# Altium PCB ARM2-2.5.PcbDoc (part 2 of 2)
Units mil, origin at the board's own origin, x right, y up, seen from the top; angles counter-clockwise.
Board outline 3929.03 x 3937.01 mil, 4 copper layers (Top Layer, VCC, GND, Bottom Layer); 147 components, 96 nets, 586 pads, 225 vias.
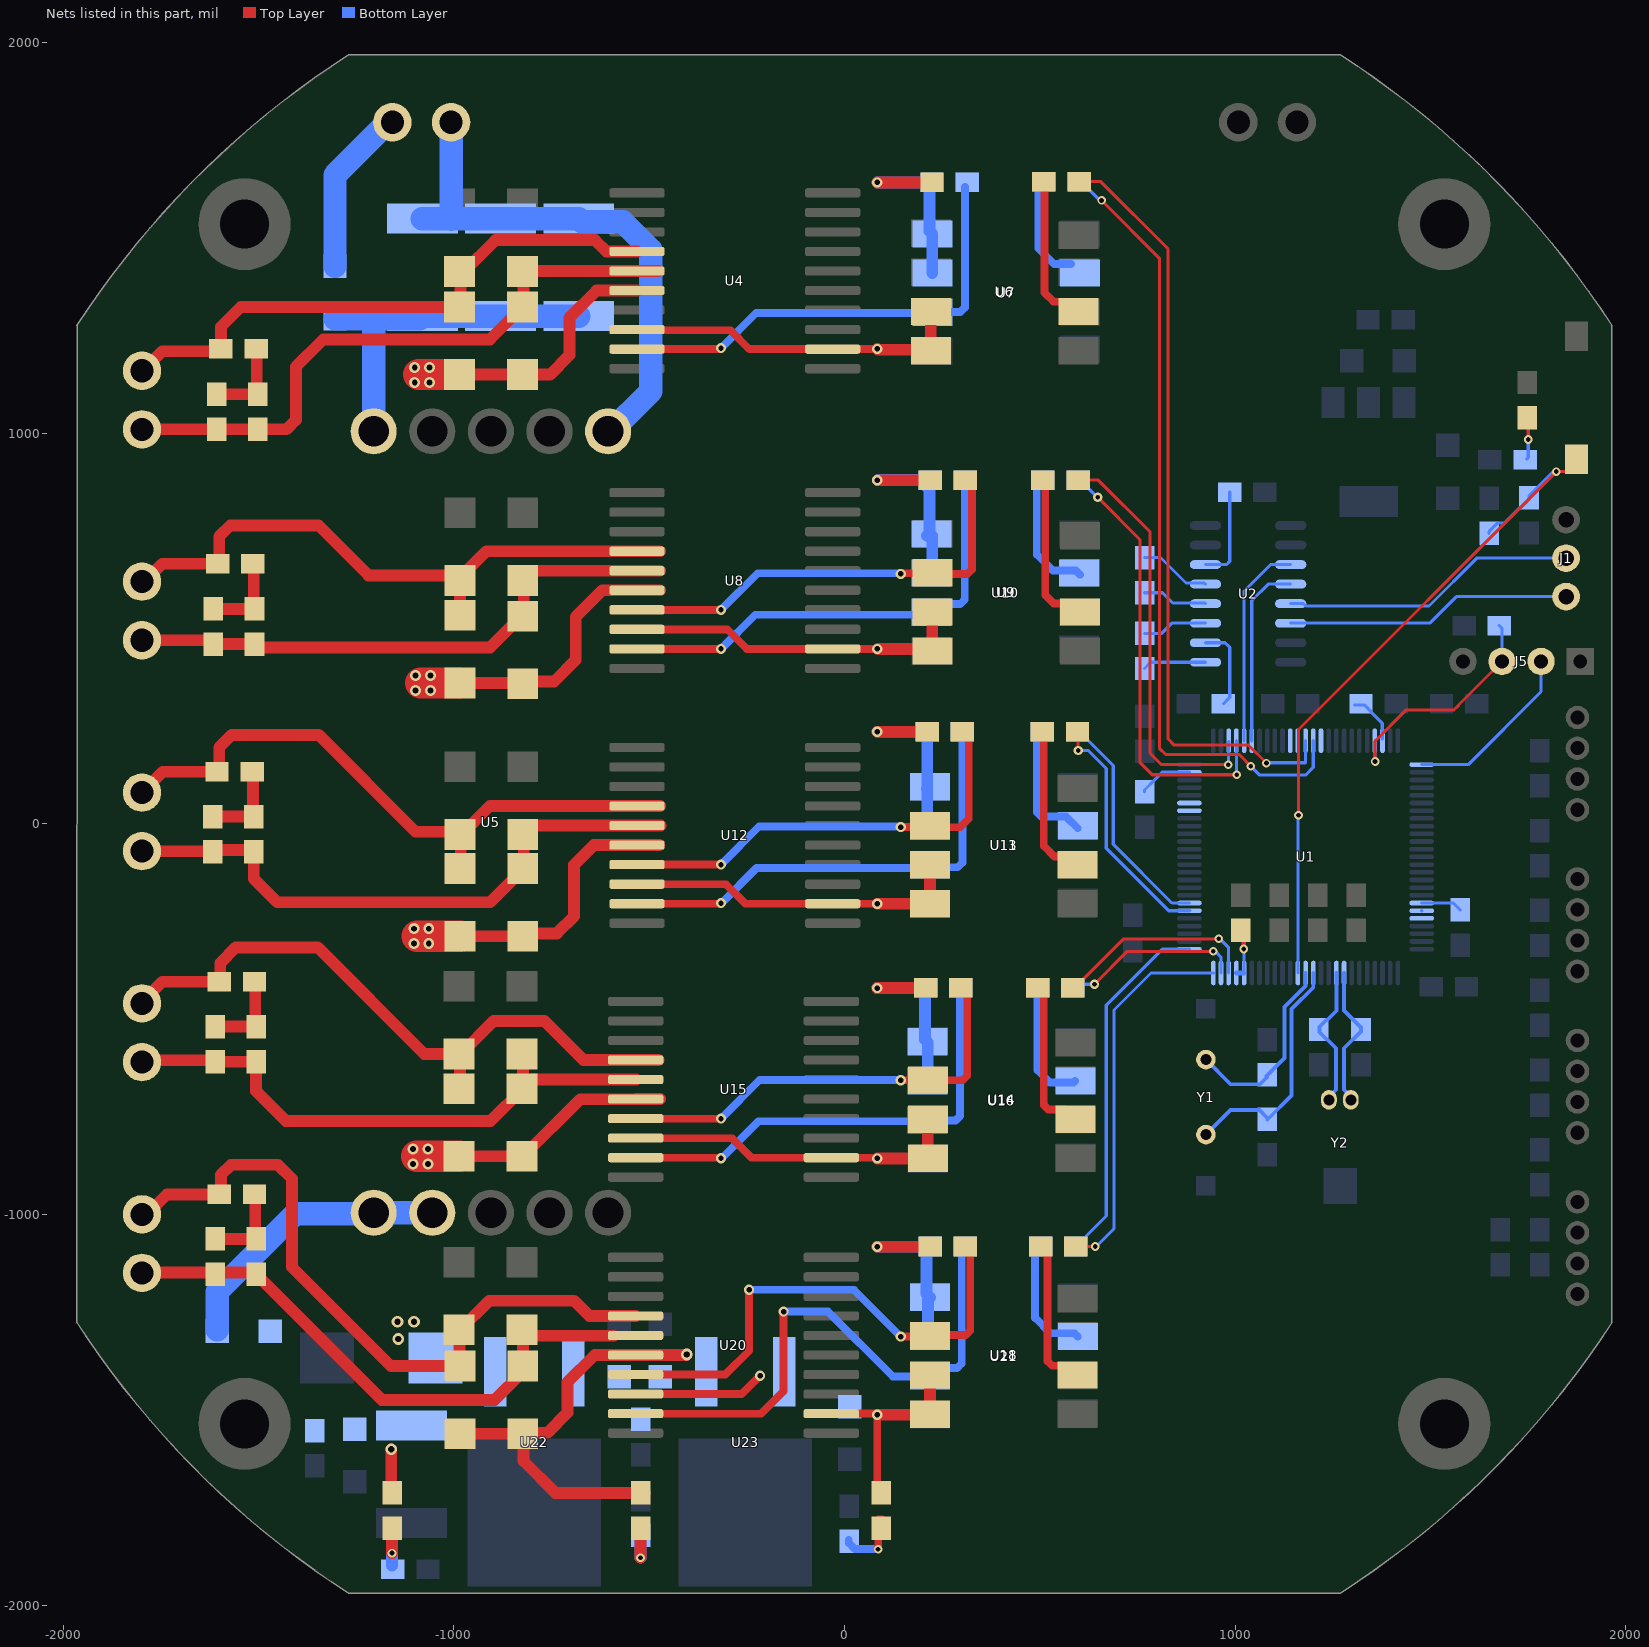
[diagram p4: the nets of this part, all layers, seen from the top]

## Via types
v1: diameter 22, hole 12, Top Layer to Bottom Layer, 120 vias
v2: diameter 26, hole 14, Top Layer to Bottom Layer, 77 vias
v3: diameter 28, hole 15, Top Layer to Bottom Layer, 16 vias
v4: diameter 24, hole 12, Top Layer to Bottom Layer, 7 vias
v5: diameter 30, hole 16, Top Layer to Bottom Layer, 5 vias

## Nets (pads, with @x,y where several pads share a name; then routed paths per layer and width w, separated by ;. In a path a pad name is that pad's centre, name@x,y a point inside that pad or via, vN(x,y) a via of type N, cw(c..) or ccw(c..) an arc to the next point about the centre after c; other vN are vias at no path point) (continued)
IN2: R15.2 U4.9 U7.6 | length 1190.8
  Top Layer w20: U4.9@-531.13,1215.38 -318.62,1215.38 v2(-316,1218)
  Bottom Layer w20: v2(-316,1218) -225.78,1308.22 U7.6@224.88,1308.22 ; U7.6@224.88,1310.22 296.5,1310.22 308.22,1321.94 R15.2@308.22,1630.06
IN3: R17.2 U8.7 U9.6 | length 1120
  Top Layer w20: U8.7@-531.13,548.21 -531.03,548.11 -420.11,548.11 -420,548 v2(-316,548) ; v2(144,640) 145.62,640 147.62,642 222.58,642 224.86,639.72 314.28,639.72 326,651.44 R17.2@326,874
  Bottom Layer w20: v2(-316,548) -222,642 v2@138.68,642
IN4: R20.2 U8.9 U10.6 | length 1178.2
  Top Layer w20: U8.9@-531.13,448.21 -531.03,448.11 -316.11,448.11 v2(-316,448)
  Bottom Layer w20: v2(-316,448) -228.28,535.72 U10.6@224.88,535.72 ; U10.6@224.88,537.72 249.92,562.76 295.98,562.76 307.7,574.48 R20.2@307.7,862.19
IN5: R22.2 U11.6 U12.7 | length 1122.1
  Top Layer w20: U12.7@-531.13,-104 v2(-316,-104) ; v2(144,-8) 214.58,-8 216.58,-6 218.86,-8.28 296,-8.28 318,13.72 318,221.32 303,236.32 R22.2@301.38,236.32
  Bottom Layer w20: v2(-316,-104) -218,-6 v2@135.04,-6
IN6: R24.2 U12.9 U13.6 | length 1211.2
  Top Layer w20: U12.9@-531.13,-204 v2@-316,-204
  Bottom Layer w20: v2@-316.77,-201.54 v2(-316,-202.31) -314.53,-202.31 -225,-112.78 U13.6@218.88,-112.78 ; U13.6@218.88,-110.78 289.98,-110.78 301.7,-99.07 R24.2@301.7,236.32
IN7: R27.2 U14.6 U15.7 | length 1118.8
  Top Layer w20: U15.7@-533.13,-754.21 v2@-316,-754.21 ; v2@142.85,-654.85 v2(144,-656) 213.14,-656 213.19,-655.94 302.28,-655.94 314,-644.23 314,-440.21 R27.2@299,-425.21
  Bottom Layer w20: v2(-316,-754) -216.85,-654.85 v2@142.85,-654.85
IN8: R30.2 U15.9 U16.6 | length 1193.6
  Top Layer w20: U15.9@-533.13,-854.21 v2@-316,-854.21
  Bottom Layer w20: v2@-314.38,-855.47 -219.85,-760.95 U16.6@213.22,-760.95 ; U16.6@213.22,-758.95 284.32,-758.95 296.04,-747.23 R30.2@296.04,-425.21
  other v2: -316,-855.47
IN9: R34.2 U18.6 U20.7 | length 1318.8
  Top Layer w20: U20.7@-534.67,-1409.06 -305.06,-1409.06 -244,-1348 v2(-244,-1192) ; v2(144,-1312) 216.64,-1312 220.43,-1308.22 310.28,-1308.22 322,-1296.5 R34.2@322,-1096.35 ; R34.2@309.68,-1081.35 313,-1081.35 R34.2@328,-1096.35
  Bottom Layer w20: v2(-244,-1192) 24,-1192 v2(144,-1312)
IN10: R36.2 U20.9 U21.6 | length 1430.1
  Top Layer w20: U20.9@-534.67,-1509.06 -534.2,-1509.53 -213.53,-1509.53 -156,-1452 v2(-156,-1248)
  Bottom Layer w20: v2(-156,-1248) -42,-1248 123.72,-1413.72 U21.6@218.86,-1413.72 ; U21.6@218.86,-1411.72 238.44,-1392.14 288.28,-1392.14 300,-1380.42 R36.2@300,-1094.65
INPUT1: R13.1 U1.63 | length 1987.5
  Top Layer w8: R13.1@600.36,1644.06 655.94,1644.06 828,1472 828,218 844,202 1034,202 v1(1080,156)
  Bottom Layer w8: v1(1080,156) 1080.69,156.69 1180.21,156.69 U1.63@1180.21,213.11
INPUT2: R16.1 U1.64 | length 2033.6
  Top Layer w8: v1(658,1596) 806,1448 806,194.06 822.06,178 1010,178 v1(1040,148)
  Bottom Layer w8: R16.1@599.81,1628.06 621.36,1628.06 650.74,1598.68 655.32,1598.68 v1(658,1596) ; v1(1040,148) 1063,125 1179.87,125 1199.89,145.02 U1.64@1199.89,213.11
INPUT3: R18.1 U1.53 | length 1076.9
  Top Layer w8: R18.1@598,880.19 649.81,880.19 782,748 782,181.29 811.29,152 v1(982,152)
  Bottom Layer w8: v1(982,152) 982.68,152.68 982.68,209.61 U1.53@983.68,210.61
INPUT4: R21.1 U1.54 | length 1128.3
  Top Layer w8: v4(648,836) 756,728 756,158 788,126 v1(1004,126)
  Bottom Layer w8: R21.1@602,862.19 621,862.19 647.19,836 v4(648,836) ; U1.54@1003.04,213.03 1003.52,212.55 1003.52,126.48 v1(1004,126)
INPUT5: R23.1 U1.31 | length 623
  Top Layer w8: v4(598,188) R23.1@598,235.68
  Bottom Layer w8: v4(598,188) 624,188 670,142 670,-62 829.93,-221.93 U1.31@882.97,-221.93 U1.31@883.7,-221.2
INPUT6: R26.1 U1.32 | length 589.4
  Bottom Layer w8: R26.1@605,218.32 618.68,232 618.68,219 688,149.68 688,-52.24 838,-202.24 U1.32@882.97,-202.24
INPUT7: R28.1 U1.23 | length 525
  Top Layer w8: R28.1@584.34,-419.21 589.34,-419.21 714.55,-294 v1(958,-294)
  Bottom Layer w8: v1(958,-294) 960.57,-294 983.35,-316.78 U1.23@983.35,-381.44
INPUT8: R31.1 U1.24 | length 453.5
  Top Layer w8: v4(640,-410) 724,-326 v1(944,-326)
  Bottom Layer w8: R31.1@604,-426.21 604,-416.33 610.34,-410 v4(640,-410) ; v1(944,-326) 946.68,-328.68 951.19,-328.68 963.67,-341.15 U1.24@963.67,-381.37 U1.24@963.67,-381.37
INPUT9: R35.1 U1.25 | length 970
  Top Layer w8: R35.1@592,-1081.35 v1(642,-1081.35)
  Bottom Layer w8: v1(642,-1081.35) 644.65,-1081.35 690,-1036 690,-476 784.63,-381.37 U1.25@943.99,-381.37
INPUT10: R37.1 U1.26 | length 927.9
  Bottom Layer w8: R37.1@594,-1079.35 R37.1@592,-1081.35 597,-1081.35 618,-1060.35 618,-1055.35 670,-1003.35 670,-464 813.65,-320.35 U1.26@882.97,-320.35
INPUT_CeTui1: U1.95 | length 1
  Bottom Layer w8: U1.95@1476.72,-221.2 U1.95@1477.45,-221.93
INPUT_CeTui2: U1.96
INPUT_CeTui3: U1.44
INPUT_CeTui4: U1.45
INPUT_DuoJi1: U1.61
INPUT_DuoJi2: U1.62
INPUT_ZhuTui: U1.65
NetC8_2: C8.2 U1.49 | length 138.8
  Bottom Layer w8: C8.2@768,82 768,87 795.67,114.67 813.41,132.41 U1.49@882.97,132.41
NetC9_2: C9.2 U1.73 | length 130.5
  Bottom Layer w8: C9.2@1306,305 1330,305 1348,287 1348,286 1376.33,257.67 U1.73@1376.33,217.67
NetC11_1: C11.1 U2.3 | length 166.7
  Bottom Layer w8: C11.1@768,488 812,488 838,514 U2.3@923.96,514
NetC11_2: C11.2 U2.1 | length 162.6
  Bottom Layer w8: C11.2@768,398 784,414 U2.1@923.96,414
NetC14_1: C14.1 U2.2 | length 217.6
  Bottom Layer w8: U2.2@923.96,464 974,464 986,452 986,324 C14.1@970,308
NetC19_1: C19.1 U2.5 | length 184.1
  Bottom Layer w8: C19.1@768,682 809,682 874.21,616.79 921.17,616.79 U2.5@923.96,614
NetC19_2: C19.2 U2.4 | length 167.6
  Bottom Layer w8: C19.2@768,592 814,592 840.42,565.58 922.38,565.58 U2.4@923.96,564
NetC20_2: C20.2 U2.6 | length 242.4
  Bottom Layer w8: U2.6@923.96,664 978,664 986.2,672.2 C20.2@986.2,849
NetC23_1: C23.1 C24.1 C25.1 F1.2 U5.1 | length 905.6
  Bottom Layer w60: F1.2@-1304,1293 -1086.77,1293 C25.1@-1080.15,1299.62 C24.1@-880.15,1299.62 C23.1@-680.15,1299.62 ; U5.1@-1205,1005 -1205,1284
NetC23_2: C23.2 C24.2 C25.2 J9.1 U5.5 | length 1377.6
  Bottom Layer w60: C25.2@-1080.15,1549.62 C25.2@-1007,1549.62 ; C25.2@-1007,1548 C25.2@-1007,1549.62 ; J9.1@-1007,1791.55 C25.2@-1007,1549.62 ; U5.5@-605,998.2 -496,1107.2 -496,1470 -567.24,1541.24 -671.76,1541.24 C23.2@-680.15,1549.62 C24.2@-880.15,1549.62 C25.2@-1007,1549.62
NetDS1_2: DS1.2 DS2.1 R14.1 | length 222.7
  Top Layer w30: DS2.1@-1607,1100 DS1.2@-1502,1100 -1504,1102 -1504,1214 R14.1@-1506,1216
NetDS3_2: DS3.2 DS4.1 R19.1 | length 222.2
  Top Layer w30: DS4.1@-1615,550.5 DS3.2@-1510,550.5 -1512,552.5 -1512,664 R19.1@-1514,666
NetDS5_2: DS5.2 DS6.1 R25.1 | length 221.7
  Top Layer w30: DS6.1@-1617,19 DS5.2@-1512,19 -1514,21 -1514,132 R25.1@-1516,134
NetDS7_2: DS7.2 DS8.1 R32.1 | length 221.2
  Top Layer w30: DS8.1@-1611,-518.5 DS7.2@-1506,-518.5 -1508,-516.5 -1508,-406 R32.1@-1510,-404
NetDS9_2: DS9.2 DS10.1 R38.1 | length 220.7
  Top Layer w30: DS10.1@-1611,-1062 DS9.2@-1506,-1062 -1508,-1060 -1508,-950 R38.1@-1510,-948
NetF1_1: F1.1 J9.2 | length 426.7
  Bottom Layer w60: F1.1@-1304,1428 -1304,1661 J9.2@-1167,1798
NetF2_1: F2.1 U5.9 U5.10 | length 730.7
  Bottom Layer w60: F2.1@-1605,-1294 -1605,-1197 -1405.4,-997.4 -1207.4,-997.4 U5.10@-1205,-995 U5.9@-1055,-995
NetLED1_1: LED1.1 R4.1 | length 108.5
  Top Layer w8: LED1.1@1748,1040 1750,1038 v1(1750,984)
  Bottom Layer w8: R4.1@1746,934 1750,938 v1(1750,984)
NetLED2_2: LED2.2 R29.1 | length 96
  Top Layer w30: v1(-1158,-1866) LED2.2@-1158,-1802
  Bottom Layer w30: R29.1@-1158,-1898 v1(-1158,-1866)
NetLED3_2: LED3.2 R41.1 | length 134
  Top Layer w30: v1(-522,-1878) LED3.2@-522,-1802
  Bottom Layer w30: v1(-522,-1878) R41.1@-522,-1820
NetLED4_2: LED4.2 R42.1 | length 174.8
  Top Layer w20: v1(86,-1856) 86.38,-1855.62 86.38,-1782.38 86,-1782 88,-1780 LED4.2@96,-1780
  Bottom Layer w20: R42.1@11,-1832 11,-1840 27,-1856 v1(86,-1856)
NetR2_1: R2.1 U1.94 | length 105.9
  Bottom Layer w8: U1.94@1477.45,-202.24 1558.24,-202.24 R2.1@1576,-220
NetR13_2: R13.2 U6.2 | length 376.9
  Top Layer w20: R13.2@512,1630.06 512,1360 535.24,1336.76 573.78,1336.76 U6.2@598.82,1311.72
NetR16_2: R16.2 U7.2 | length 265
  Bottom Layer w20: R16.2@496,1638 496,1474 536.99,1433.01 U7.2@580.05,1433.01
NetR18_2: R18.2 U9.2 | length 403.4
  Top Layer w20: R18.2@508,880.19 514,874.19 514,586 535.73,564.27 581.27,564.27 U9.2@602.82,542.72
NetR21_2: R21.2 U10.2 | length 329.9
  Bottom Layer w20: R21.2@508,880.19 507,880.19 492,865.19 492,690 533.38,648.62 591.94,648.62 U10.2@602.84,637.72
NetR23_2: R23.2 U11.2 | length 382.8
  Top Layer w20: R23.2@510,218.32 510,-56 537.24,-83.24 571.78,-83.24 U11.2@596.82,-108.28
NetR26_2: R26.2 U13.2 | length 309.7
  Bottom Layer w20: R26.2@492,218.32 492,30.64 503.72,18.92 567.14,18.92 U13.2@596.84,-10.78
NetR28_2: R28.2 U14.2 | length 390.4
  Top Layer w20: R28.2@510,-425.21 510,-719.19 521.72,-730.91 566.11,-730.91 U14.2@591.15,-755.94
NetR31_2: R31.2 U16.2 | length 321.1
  Bottom Layer w20: R31.2@494.34,-419.21 494.34,-630.33 525.44,-661.44 586.56,-661.44 U16.2@590,-658
NetR35_2: R35.2 U18.2 | length 395.4
  Top Layer w20: R35.2@502,-1081.35 505,-1081.35 520,-1096.35 520,-1375.02 531.72,-1386.74 577.34,-1386.74 U18.2@598.82,-1408.22
NetR37_2: R37.2 U21.2 | length 318.7
  Bottom Layer w20: R37.2@497.88,-1078 488,-1087.88 488,-1264 527.35,-1303.35 588.45,-1303.35 U21.2@596.82,-1311.72
OSC32IN: C17.2 U1.8 Y2.1 | length 367.4
  Bottom Layer w10: U1.8@1278.64,-381.37 1278.64,-477.64 1322,-521 1322,-531 1279,-574 1279,-680.14 1296,-697.14 Y2.1@1296,-706
OSC32OUT: C18.2 U1.9 Y2.2 | length 369
  Bottom Layer w10: Y2.2@1240,-706 1240,-698.14 1258,-680.14 1258,-574 1235,-551 1234,-551 1216,-533 1216,-519 1234,-501 1236,-501 1258.95,-478.05 U1.9@1258.95,-381.37
OSCIN: C15.2 U1.12 Y1.1 | length 620.9
  Bottom Layer w10: Y1.1@925,-795.13 988.13,-732 1062,-732 1082,-752 1082,-757 1144,-695 1144,-474 1199.89,-418.11 U1.12@1199.89,-381.37
OSCOUT: C16.2 U1.13 Y1.2 | length 495.7
  Bottom Layer w10: Y1.2@925,-603 988,-666 1064,-666 C16.2@1082,-648 ; C16.2@1080,-645 1126,-599 1126,-468 1179.86,-414.14 1179.86,-381.72 U1.13@1180.21,-381.37
OUT1: D1.2 D3.1 J10.1 R14.2 U4.4 | length 1485.7
  Top Layer w30: J10.1@-1796.21,1160 -1746.21,1210 -1602,1210 R14.2@-1596,1216 -1596,1272 -1544.59,1323.41 D1.2@-985.15,1323.41 ; D1.2@-982.85,1323.41 D3.1@-982.85,1406.61 ; D3.1@-975.7,1412.19 -893.09,1494.8 -638.8,1494.8 -609.38,1465.38 U4.4@-531.13,1465.38
OUT2: D2.2 D4.1 DS1.1 DS2.2 J10.2 U4.5 | length 1589
  Top Layer w30: J10.2@-1798,1010 DS1.1@-1502,1010 -1428,1010 -1404,1034 -1404,1170 -1334,1240 -907.41,1240 D2.2@-824,1323.41 ; D4.1@-837.7,1399.09 D4.1@-822.85,1413.94 ; D2.2@-821.7,1347.78 D4.1@-821.7,1401.09 ; D4.1@-807.25,1415.38 U4.5@-531.13,1415.38 U4.5@-476,1415.38
OUT3: D5.2 D7.1 J11.1 R19.2 U8.4 | length 1590.8
  Top Layer w30: J11.1@-1790.96,631.25 -1780.96,631.25 -1746.21,666 R19.2@-1604,666 -1600,670 -1600,736 -1572,764 -1346,764 -1218,636 -990,636 -984.26,630.26 D7.1@-982,628 ; D7.1@-987.17,627.35 -916.31,698.21 U8.4@-531.13,698.21 U8.4@-472,698.21 ; D5.2@-984.3,540 D7.1@-984.3,623.35 D7.1@-984.3,627.35
OUT4: D6.2 D8.1 DS3.1 DS4.2 J11.2 U8.5 | length 1428.8
  Top Layer w30: J11.2@-1798,470.25 -1624.75,470.25 DS4.2@-1615,460.5 DS3.1@-1510,460.5 DS3.1@-1510,455.5 ; -1481.63,452 -906.85,452 -820.85,538 D8.1@-820.85,627.35 ; D8.1@-817.99,648.21 U8.5@-531.13,648.21 U8.5@-472,648.21
OUT5: D9.2 D11.1 J12.1 R25.2 U12.4 | length 1671.9
  Top Layer w30: J12.1@-1798,80.5 -1744.5,134 R25.2@-1606,134 -1600,140 -1600,196 -1568,228 -1346,228 -1098,-20 -986,-20 D11.1@-981.83,-24.17 ; D9.2@-1006.3,-136 D9.2@-984.3,-114 ; D9.2@-982,-114 -982,-28.65 -907.35,46 U12.4@-531.13,46 U12.4@-472,46
OUT6: D10.2 D12.1 DS5.1 DS6.2 J12.2 U12.5 | length 1561.5
  Top Layer w30: J12.2@-1798,-69.5 DS6.2@-1625,-69.5 ; DS6.2@-1627,-57.5 -1617,-67.5 DS6.2@-1617,-71 ; DS6.2@-1617,-66.5 DS5.1@-1512,-66.5 ; DS5.1@-1512,-71 -1512,-140 -1452,-200 -906.85,-200 -820.85,-114 -820.85,-30.65 -794.2,-4 U12.5@-531.13,-4 U12.5@-470,-4
OUT7: D13.2 D15.1 J14.1 R32.2 U15.4 | length 1678.1
  Top Layer w30: J14.1@-1796,-444.25 -1786.46,-444.25 -1746.21,-404 R32.2@-1600,-404 -1598,-402 -1598,-356 -1558,-316 -1348,-316 -1075.35,-588.65 -993.35,-588.65 -991.35,-590.65 D15.1@-984,-590.65 ; D13.2@-984,-677.39 D15.1@-984,-590.65 ; U15.4@-476,-604 -532.92,-604 -533.13,-604.21 -667.79,-604.21 -768,-504 -897.35,-504 D15.1@-984,-590.65
OUT8: D14.2 D16.1 DS7.1 DS8.2 J14.2 U15.5 | length 1503.5
  Top Layer w30: J14.2@-1798,-609.25 -1793.25,-604.5 DS8.2@-1611,-604.5 ; DS8.2@-1611,-608.5 DS7.1@-1506,-608.5 -1506,-684 -1430,-760 -905.46,-760 -822.85,-677.39 D16.1@-822.85,-590.65 ; D14.2@-821.85,-677.58 -798.48,-654.21 U15.5@-533.13,-654.21
OUT9: D18.2 D20.1 J15.1 R38.2 U20.4 | length 1811.8
  Top Layer w30: J15.1@-1798,-999 -1785,-999 -1734,-948 R38.2@-1600,-948 -1596,-944 -1596,-898 -1570,-872 -1450,-872 -1414,-908 -1414,-1134 -1160.61,-1387.39 D18.2@-984.3,-1387.39 ; D18.2@-986.3,-1370 -985.3,-1369 -985.3,-1295.61 D20.1@-986.3,-1294.61 ; D20.1@-984,-1294.61 -909.39,-1220 -692,-1220 -652.94,-1259.06 U20.4@-534.67,-1259.06
OUT10: D19.2 D21.1 DS9.1 DS10.2 J15.2 U20.5 | length 1475.9
  Top Layer w30: J15.2@-1796,-1148 -1611,-1148 DS9.1@-1502,-1148 ; DS9.1@-1506,-1152 -1506,-1157 -1496,-1167 -1491,-1167 -1184,-1474 -895.46,-1474 -822.85,-1401.39 D21.1@-822.85,-1310 ; D21.1@-825.15,-1294.61 -809.76,-1310 U20.5@-590.54,-1310
RST: C21.1 K1.1 R3.1 U1.14 | length 1873.3
  Top Layer w8: v1(1162,22) 1162,242 v1(1822,902) 1848.15,902 1871.08,924.93 K1.1@1871.08,936
  Bottom Layer w8: U1.14@1160.52,-381.37 1161.25,-380.72 1161.25,21.25 v1(1162,22) ; R3.1@1650,744 1650,749 1671,770 1688,770 1726.87,808.87 1731,808.87 1752,829.87 1752,839.87 1811.45,899.32 1819.32,899.32 v1(1822,902)
RXA: J1.2 U2.13 | length 758.1
  Bottom Layer w8: U2.13@1142,564 1174.77,564 1180.77,558 1496,558 1618.41,680.42 J1.2@1846.87,680.42
RXD: U1.56 U2.12 | length 475.9
  Bottom Layer w8: U1.56@1042.41,213.11 1042.41,572 1084.41,614 U2.12@1142,614
SWCLK: J5.2 U1.76 | length 459.9
  Bottom Layer w8: U1.76@1477.45,152.09 1596.09,152.09 1782.87,338.87 J5.2@1782.87,416
SWDIO: J5.3 R11.1 U1.72 | length 609.8
  Top Layer w8: v1(1358,160) 1358,212 1438,292 1560,292 1572,304 ; 1571.43,304.57 J5.3@1682.87,416
  Bottom Layer w8: U1.72@1357.38,213.03 1357.69,212.72 1357.69,160.31 v1(1358,160) ; R11.1@1676,508 1682.87,501.13 J5.3@1682.87,416
TXA: J1.1 U2.14 | length 733
  Bottom Layer w8: U2.14@1142,514 1498,514 1566,582 J1.1@1846.87,582
TXD: U1.55 U2.11 | length 530.3
  Bottom Layer w8: U1.55@1022.73,213.11 1022.73,596 1090.73,664 U2.11@1142,664
VCC_5V: C32.1 LED4.1 R12.1 R15.1 R17.1 R20.1 R22.1 R24.1 R27.1 R30.1 R34.1 R36.1 U4.8 U4.12 U6.7 U6.8 U7.7 U7.8 U8.8 U8.12 U9.7 U9.8 U10.7 U10.8 U11.7 U11.8 U12.8 U12.12 U13.7 U13.8 U14.7 U14.8 U15.8 U15.12 U16.7 U16.8 U18.7 U18.8 U20.8 U20.12 U21.7 U21.8 U23.3 | length 6814.1
  Top Layer w20: U15.8@-533.13,-804.21 -287.79,-804.21 -238,-854 80.92,-854 82.92,-856 v2(84,-856) ; U20.8@-532.8,-1459.06 -263.06,-1459.06 v2(-216,-1412) ; U12.8@-531.13,-154 -303.5,-154 -253.5,-204 v2(84,-204) ; U8.8@-531.13,498.21 -300.21,498.21 -250.21,448.21 U8.12@-30.27,448.21 ; U4.8@-529.32,1263.57 -291.57,1263.57 -243.38,1215.38 U4.12@-47.96,1215.38 ; U4.12@-47.96,1215.69 -30.27,1215.69 83.69,1215.69 v2(84,1216) ; U4.12@-30.27,1215.38 U4.12@-29.96,1215.69 ; U20.12@-30,-1509.06 79.98,-1509.06 82.92,-1512 v2(84,-1512) LED4.1@84,-1712 ; U8.12@-28.46,448.21 -28.35,448.11 85.89,448.11 v2@86,448
  Top Layer w30: v2(84,-1512) U18.8@218.58,-1512 ; v2(84,-1082) R34.1@216.11,-1082 ; v2(84,-856) U14.8@208.63,-856 ; v2(84,-420) R27.1@198.82,-420 ; v2(84,-204) U11.8@212.3,-204 ; v2(84,236) R22.1@217.53,236 ; v2(84,1216) 86,1214 218.58,1214 U6.8@220.86,1211.72 U6.7@220.86,1311.72 ; v2(84,1642) R12.1@197.02,1642 ; v2@86,448 219.58,448 U9.8@224.86,442.72 U9.7@224.86,539.72 ; v2@86,880 199.89,880 R17.1@201.89,878 ; U18.7@202.58,-1396 218.86,-1412.28 U18.8@218.86,-1510.28 ; U14.8@213.19,-855.28 U14.7@213.19,-755.28 ; U11.8@218.86,-204.28 U11.7@218.86,-104.28
  Bottom Layer w30: v2(84,-1082) 207.7,-1082 R36.1@215.7,-1090 ; v2(84,-420) 84.79,-419.21 R30.1@208.04,-419.21 ; v2(84,236) 191.7,236 R24.1@211.7,216 ; v2(84,1642) 84.06,1642.06 R15.1@224.04,1642.06 ; v2@86,880 86.19,880.19 R20.1@219.68,880.19 ; R30.1@208.82,-424 206.04,-426.79 206.04,-551.77 213.22,-558.95 U16.7@213.22,-658.95 ; R36.1@209.7,-1090 209.7,-1202.56 U21.8@218.86,-1211.72 ; R20.1@210,864 R20.1@214,860 ; U10.8@210.52,737.72 217.7,744.9 R20.1@217.7,858.3 ; U13.8@210.92,90 U13.8@211.7,89.22 ; R24.1@211.7,218.32 U13.8@211.7,89.22 ; U21.8@213.7,-1211.72 213.7,-1306.56 U21.7@218.86,-1311.72 ; R15.1@217.7,1630 217.7,1517.4 224.88,1510.22 U7.7@224.88,1410.22 ; U13.7@218.88,-10.78 211.7,-3.6 U13.8@211.7,89.22 ; U10.8@223.65,736.48 224.88,737.72 U10.7@224.88,637.72
  other v2: 84,448 84,880
VCC_12V: C28.2 C30.1 C31.1 D18.1 D19.1 LED3.1 U20.6 U22.3 U23.1 | length 1122
  Top Layer w30: D18.1@-982,-1560.61 D19.1@-823.15,-1560.61 D19.1@-821.57,-1560.61 ; D19.1@-822,-1558 -821.57,-1558.43 D19.1@-821.57,-1560.61 ; D19.1@-820.24,-1560 -818.24,-1558 -760,-1558 -709,-1507 -709,-1429 -639.06,-1359.06 -405.06,-1359.06 v5(-404,-1358) ; LED3.1@-512,-1712 -740,-1712 -821.57,-1630.43 D19.1@-821.57,-1560.61
VCC_24V: C26.1 C27.2 C29.1 D1.1 D2.1 D5.1 D6.1 D9.1 D10.1 D13.1 D14.1 F2.2 LED2.1 TVS1.2 U4.6 U8.6 U12.6 U15.6 U22.1 | length 3059.1
  Top Layer w30: LED2.1@-1160,-1710 v5(-1160,-1600) ; D5.1@-984.3,360.78 D6.1@-825.15,360.78 ; D13.1@-984,-850.61 D14.1@-825.15,-850.61 -822.85,-850.61 -676.45,-704.21 -533.13,-704.21 -532.92,-704 U15.6@-472,-704 ; D1.1@-982.85,1150.19 D2.1@-824,1150.19 -753.46,1150.19 -704,1199.65 -704,1296 -634.62,1365.38 U4.6@-531.13,1365.38 ; D9.1@-982,-287.22 D10.1@-823.15,-287.22 -820.85,-287.22 -813.63,-280 -736,-280 -692,-236 -692,-104 -642,-54 U12.6@-531.13,-54 U12.6@-474,-54 ; D6.1@-820.85,364.78 -743.22,364.78 -688,420 -688,530 -619.79,598.21 U8.6@-531.13,598.21 U8.6@-472,598.21
  Top Layer w80: -1095.39,-850.61 D13.1@-986.3,-850.61 D13.1@-984,-850.61 ; -1093.39,-287.22 D9.1@-984.3,-287.22 D9.1@-982,-287.22 ; -1089.46,1150.19 D1.1@-985.15,1150.19 ; -1085.22,360.78 D5.1@-984.3,360.78
  other v3: -1104,-870 -1066,-870 -1104,-832 -1066,-832 -1102,-306 -1064,-306 -1102,-268 -1064,-268 -1098,342 -1060,342 -1098,380 -1060,380 -1100,1130 -1062,1130 -1100,1168 -1062,1168
  other v5: -1142,-1318 -1144,-1274 -1102,-1274
VDD: R1.1 U1.21 U1.22 | length 122.8
  Top Layer w12: R1.1@1014,-272 1022,-280 v1(1022,-320)
  Bottom Layer w8: v1@1022,-330 1022.36,-330.36 1022.36,-381.08 U1.21@1022.73,-381.37
  Bottom Layer w12: U1.22@1003.04,-381.37 U1.21@1022.73,-381.37
pads on no net: U1.1 U1.2 U1.3 U1.4 U1.5 U1.7 U1.15 U1.16 U1.17 U1.18 U1.29 U1.30 U1.33 U1.34 U1.35 U1.36 U1.37 U1.38 U1.39 U1.40 U1.41 U1.42 U1.43 U1.46 U1.47 U1.48 U1.51 U1.52 U1.57 U1.58 U1.59 U1.60 U1.66 U1.69 U1.70 U1.71 U1.78 U1.79 U1.80 U1.81 U1.82 U1.83 U1.84 U1.85 U1.86 U1.87 U1.88 U1.97 U1.98 U2.7 U2.8 U2.9 U2.10 U4.3 U4.13 U4.14 U4.15 U4.16 U4.17 U4.18 U5.2 U5.3 U5.4 U5.8 U6.1 U6.4 U7.1 U7.4 U8.3 U8.13 U8.14 U8.15 U8.16 U8.17 U8.18 U9.1 U9.4 U10.1 U10.4 U11.1 U11.4 U12.3 U12.13 U12.14 U12.15 U12.16 U12.17 U12.18 U13.1 U13.4 U14.1 U14.4 U15.3 U15.13 U15.14 U15.15 U15.16 U15.17 U15.18 U16.1 U16.4 U18.1 U18.4 U20.3 U20.13 U20.14 U20.15 U20.16 U20.17 U20.18 U21.1 U21.4 Y1. Y2.

## Polygon pours and split planes (outlines as drawn)
GND1 on GND "GND-GND1" (solid, remove dead copper, pour order 188): 1654.34,-1318 1866,-1318 1951.78,-1232.22 1951.78,1262.92 1880.7,1334 1608.62,1334 1386,1414 1386,1773.12 1266.91,1947.79 703.82,1947.79 435.74,1748.99 435.74,-1760.4 689.02,-1948.21 1266.91,-1948.21 1386,-1773.55 1386,-1414.43
VCC_24V on GND "VCC-VCC_24V" (solid, remove dead copper, pour order 155): -1441.29,-1149.3 -1185.29,-1342 -1118,-1342 -1074,-1298 -1074,-1257.48 -1357.98,-1066 -1357.98,-901.92 -1341.29,-890 -1048.57,-890 -1037.44,-881.34 -1037.44,-821.12 -1050.14,-810 -1337.29,-810 -1357.98,-789.31 -1357.98,-358.27 -1315.6,-328 -1053.14,-328 -1034,-313.11 -1034,-268.25 -1057.14,-248 -1320,-248 -1357.98,-210.02 -1357.98,302.02 -1332.8,320 -1045.71,320 -1030,332.22 -1030,389.25 -1049.14,406 -1330,406 -1357.98,433.98 -1357.98,1069.91 -1322.7,1108 -1053.94,1110.01 -1034,1126.05 -1034,1179.33 -1054.71,1194 -1357.98,1194 -1441.29,1108
VCC_5V on GND "VCC-VCC_5V" (solid, remove dead copper, pour order 157): 72,-1538 94,-1538 104,-1528 104,1654.67 95.2,1662 72.82,1662 61.95,1652.98 61.95,-1527.95
VCC_12V on Bottom Layer "Bottom Layer-VCC_12V" (solid, remove dead copper, pour order 146): -553.85,-1545.74 -544.1,-1558 -500.6,-1558 -489.9,-1547.3 -489.9,-1504.93 -463.7,-1492 -326.86,-1492 -317.86,-1486 -317.85,-1307.92 -389.92,-1307.92 -460,-1378 -641.7,-1378 -659.21,-1346.77 -659.21,-1312.99 -665.11,-1304.13 -721.35,-1304.13 -727.21,-1309.99 -727.21,-1482.99 -720,-1492 -574,-1492 -553.85,-1507.89
VCC_5V on Bottom Layer "Bottom Layer-VCC_5V" (solid, remove dead copper, pour order 165): -192,-1486 -182,-1496 -120,-1496 28.4,-1538 60.18,-1538 94,-1538 104,-1528 104,-1496 62,-1454 7.52,-1454 -102,-1355.47 -114,-1343.47 -114,-1317.47 -125.47,-1306 -180,-1306 -192,-1318 -192,-1381.74 -240,-1394.26 -240,-1427.47 -192,-1439.52
GND2 on Bottom Layer "Bottom Layer-GND2" (solid, remove dead copper, pour order 142): -470,-1776.82 -470,-1933.28 -450.35,-1956 -49.64,-1956 -40,-1942.33 -40,-1786.2 -19.71,-1772 38.73,-1772 51,-1756.35 51,-1608 35.32,-1568.7 -80.51,-1568.7 -421.44,-1567.36 -436,-1584 -598.55,-1584 -628.93,-1561.84 -965.11,-1561.84 -975,-1574.58 -975,-1709.53 -1017,-1740.71 -1197,-1740.71 -1219.84,-1650 -1313.11,-1650 -1329,-1606 -1383,-1606 -1393,-1616 -1393,-1682 -1197,-1834 -1129,-1834 -1103,-1852 -1103,-1922 -981.71,-1956 -598.55,-1956 -580,-1933.28 -580,-1773 -573,-1766 -487,-1766
VCC_24V on Bottom Layer "Bottom Layer-VCC_24V" (solid, remove dead copper, pour order 167): -1440.89,-1332 -1432.89,-1324 -1432.89,-1266 -1412.89,-1246 -1228.89,-1246 -1166.89,-1308 -1166.89,-1346 -1166.63,-1346 -1166.63,-1473.15 -1180.84,-1496 -1269.36,-1496 -1291.11,-1517.74 -1376.99,-1517.74 -1384.89,-1526.36 -1384.89,-1580 -1379.15,-1585.74 -1212.26,-1585.74 -1174,-1624 -1146,-1624 -1107.74,-1585.74 -1015.4,-1585.74 -1008.89,-1576.99 -1008.89,-1510.97 -996,-1496 -868.22,-1496 -858.89,-1488 -858.89,-1312.29 -1202.89,-1180 -1424.89,-1180 -1504.89,-1260 -1504.89,-1326 -1498.89,-1332
GND2 on Bottom Layer "Bottom Layer-GND2 1" (solid, remove dead copper, pour order 119): -442,-1316 -433.24,-1307.24 -433.24,-1249.1 -521.72,-956.41 -561.22,-916.9 -813.63,-916.9 -833.72,-933.89 -833.72,-1073.62 -614,-1234.94 -614,-1308 -606,-1316
GND2 on VCC "VCC-GND2" (solid, remove dead copper, pour order 184): -1678.76,-1315.16 -1394.76,-1417.21 -1394.76,-1776.33 -1275.67,-1951 90.66,-1951 344,-1763.14 344,1757.14 90.66,1945 -1275.67,1945 -1394.76,1770.33 -1394.76,1411.21 -1678.76,1309.16 -1678.76,-3
GND1 on Top Layer "Top Layer-GND1" (solid, remove dead copper, pour order 187): 1654.34,-1318 1866,-1318 1951.78,-1232.22 1951.78,1262.92 1880.7,1334 1608.62,1334 1386,1414 1386,1773.12 1266.91,1947.79 703.82,1947.79 435.74,1748.99 435.74,-1760.4 689.02,-1948.21 1266.91,-1948.21 1386,-1773.55 1386,-1414.43

## Other copper
Top Layer:
  pour cut-out: 1820,255.37 1820,116.63 1928,116.63 1928,255.37
  pour cut-out: 1820,-157.96 1820,-296.7 1928,-296.7 1928,-157.96
  pour cut-out: 1820,-571.3 1820,-710.04 1928,-710.04 1928,-571.3
  pour cut-out: 1820,-984.63 1820,-1123.37 1928,-1123.37 1928,-984.63
  pour cut-out: 662,-1181.68 499.64,-1181.68 499.64,-1041.68 662,-1041.68
  pour cut-out: 655.98,-519.54 496.98,-519.54 496.98,-379.54 655.98,-379.54
  pour cut-out: 1206,-667.78 1332.04,-667.78 1332.04,-974.26 1208.04,-974.26 1206.04,-976.26 1206,-976.22
  pour cut-out: 876.2,-443.98 974,-443.98 974,-479.98 972,-481.98 1018.16,-528.14 1020,-528.14 1024,-867.34 974.44,-916.9 974.44,-963.54 974,-963.98 878,-963.98 878,-920.91 878.52,-920.39 826,-867.86 826,-528.14 828.04,-528.14 876.2,-479.98
  pour cut-out: 1078,1870 1078,1722 1238,1722 1238,1870
  pour cut-out: 663,136 504,136 504,276 663,276
  pour cut-out: 669,782 564,782 564,920 669,920
  pour cut-out: 666,1556 536,1556 536,1684 666,1684
VCC:
  pour cut-out: 37.92,1689.5 37.92,1590.5 132,1590.5 132,1689.5
  pour cut-out: 37.92,1263.5 37.92,1164.5 132,1164.5 132,1263.5
  pour cut-out: 39.92,927.5 39.92,828.5 134,828.5 134,927.5
  pour cut-out: 39.92,495.5 39.92,396.5 134,396.5 134,495.5
  pour cut-out: 37.92,283.5 37.92,184.5 132,184.5 132,283.5
  pour cut-out: 37.92,-156.5 37.92,-255.5 132,-255.5 132,-156.5
  pour cut-out: 37.92,-372.5 37.92,-471.5 132,-471.5 132,-372.5
  pour cut-out: 37.92,-808.5 37.92,-907.5 132,-907.5 132,-808.5
  pour cut-out: 37.92,-1034.5 37.92,-1133.5 132,-1133.5 132,-1034.5
  pour cut-out: 37.92,-1464.5 37.92,-1563.5 132,-1563.5 132,-1464.5
  pour cut-out: -262.08,-1364.5 -262.08,-1463.5 -168,-1463.5 -168,-1364.5
  pour cut-out: 39.92,-1776.5 39.92,-1875.5 134,-1875.5 134,-1776.5
  pour cut-out: -568.08,-1830.5 -568.08,-1929.5 -474,-1929.5 -474,-1830.5
  pour cut-out: -1204.08,-1818.5 -1204.08,-1917.5 -1110,-1917.5 -1110,-1818.5
  pour cut-out: -1248.5,1900 -1248.5,1693 -912,1693 -912,1900
  pour cut-out: -1217.5,-1201 -1217.5,-1397 -1028.5,-1397 -1028.5,-1201
  pour cut-out: -1177.5,-755 -1177.5,-951 -988.5,-951 -988.5,-755
  pour cut-out: -1326,-896 -1326,-1104 -905,-1104 -905,-896
  pour cut-out: -1175.5,-193 -1175.5,-389 -986.5,-389 -986.5,-193
  pour cut-out: -1169.5,457 -1169.5,261 -980.5,261 -980.5,457
  pour cut-out: -1175.5,1249 -1175.5,1008 -986.5,1008 -986.5,1249
  pour cut-out: -1296.5,1098 -1296.5,902 -900,902 -900,1098
  pour cut-out: -755,1098 -755,902 -507.5,902 -507.5,1098
GND:
  pour cut-out: 1820,-986 1820,-1124.74 1928,-1124.74 1928,-986
  pour cut-out: 1820,-572.67 1820,-711.41 1928,-711.41 1928,-572.67
  pour cut-out: 1820,-159.33 1820,-298.07 1928,-298.07 1928,-159.33
  pour cut-out: 1078,1870 1078,1722 1238,1722 1238,1870
  pour cut-out: 1206,-667.78 1332.04,-667.78 1332.04,-974.26 1208.04,-974.26 1206.04,-976.26 1206,-976.22
  pour cut-out: 876.2,-443.98 974,-443.98 974,-479.98 972,-481.98 1018.16,-528.14 1020,-528.14 1024,-867.34 974.44,-916.9 974.44,-963.54 974,-963.98 878,-963.98 878,-920.91 878.52,-920.39 826,-867.86 826,-528.14 828.04,-528.14 876.2,-479.98
  pour cut-out: 1820,254 1820,115.26 1928,115.26 1928,254
Bottom Layer:
  pour cut-out: -411,-1340 -449,-1378 -460,-1378 -389.92,-1307.92
  pour cut-out: -995.55,-1517.84 -994.91,-1517.62 -995.55,-1517.74

## Silkscreen, mask and mechanical layers (free items; w line width, h text height)
Top Overlay:
  text "24V" at -1374,1798 h30
  text "5V" at 1280,1776 h30
  text "+" at -1204,1624.5 h45
  text "+" at 1150,1620.5 h45
  text "-" at -1014,1619.51 h45
  text "-" at 986,1615.51 h45
  text "Jian+" at -1920,1264 h30
  text "-" at -1644,1225.51 h45
  text "3.3+" at 1580,1018 h30
  text "+" at -1648,900.5 h45
  text "232" at 1546.69,796 h30
  text "Dabi+" at -1954,724 h30
  text "T-R-G" at 1706,596.02 h30 r90
  text "Load" at 1348.69,460 h30
  text "3.3-DIO-CLK-GND" at 1038.25,392 h30
  text "Jian" at 1628,268 h30
  text "Xiaobi+" at -1955.48,174.79 h30
  text "A-B-V-G" at 1752,32 h30 r90
  text "DaBi" at 1636,-150 h30
  text "Wan+" at -1950,-358 h30
  text "XiaoBi" at 1580,-558 h30
  text "Zhua+" at -1954,-896 h30
  text "Wan" at 1610,-962 h30
  text "24+" at -1084,-1706 h30
  text "12+" at -432,-1706 h30
  text "5+" at 164,-1706 h30
  text "zkk24/2/5" at 734,-1850 h45
Bottom Overlay:
  text "+" at -1044,1347 h30
  text "+" at -838,1347 h30
  text "+" at -640,1343 h30
  text "+" at 1474,1123 h30
  text "+" at 1482,769 h30
  text "+" at -976,-1243 h30 r180
  text "+" at -28,-1429 h30 r180
  text "+" at -412,-1449 h30 r180
  text "+" at -616,-1451 h30 r180
  text "+" at -1010,-1503 h30
  text "+" at -1220,-1523 h30
  text "+" at -470,-1649 h30 r180
Mechanical 1:
  lines w6: -1964.6,1275.83 cw(c0,0) -1269.8,1968.5 1269.8,1968.5 cw(c0,0) 1964.34,1276.22 ; -1964.34,-1276.22 ccw(c0,0) -1269.8,-1968.5 1269.8,-1968.5 ccw(c0,0) 1964.42,-1276.1 ; -1964,-1276 -1964,1275.83 ; 1964,-1275.81 1964,1276